# Altium PCB ArcadeMVD-STM 01-1.5.PcbDoc (part 1 of 2)
Units mm, origin at the board's own origin, x right, y up, seen from the top; angles counter-clockwise.
Board outline 51.6 x 62 mm, 2 copper layers (Top Layer, Bottom Layer), stack 1.525 mm thick; 53 components, 43 nets, 216 pads, 131 vias.
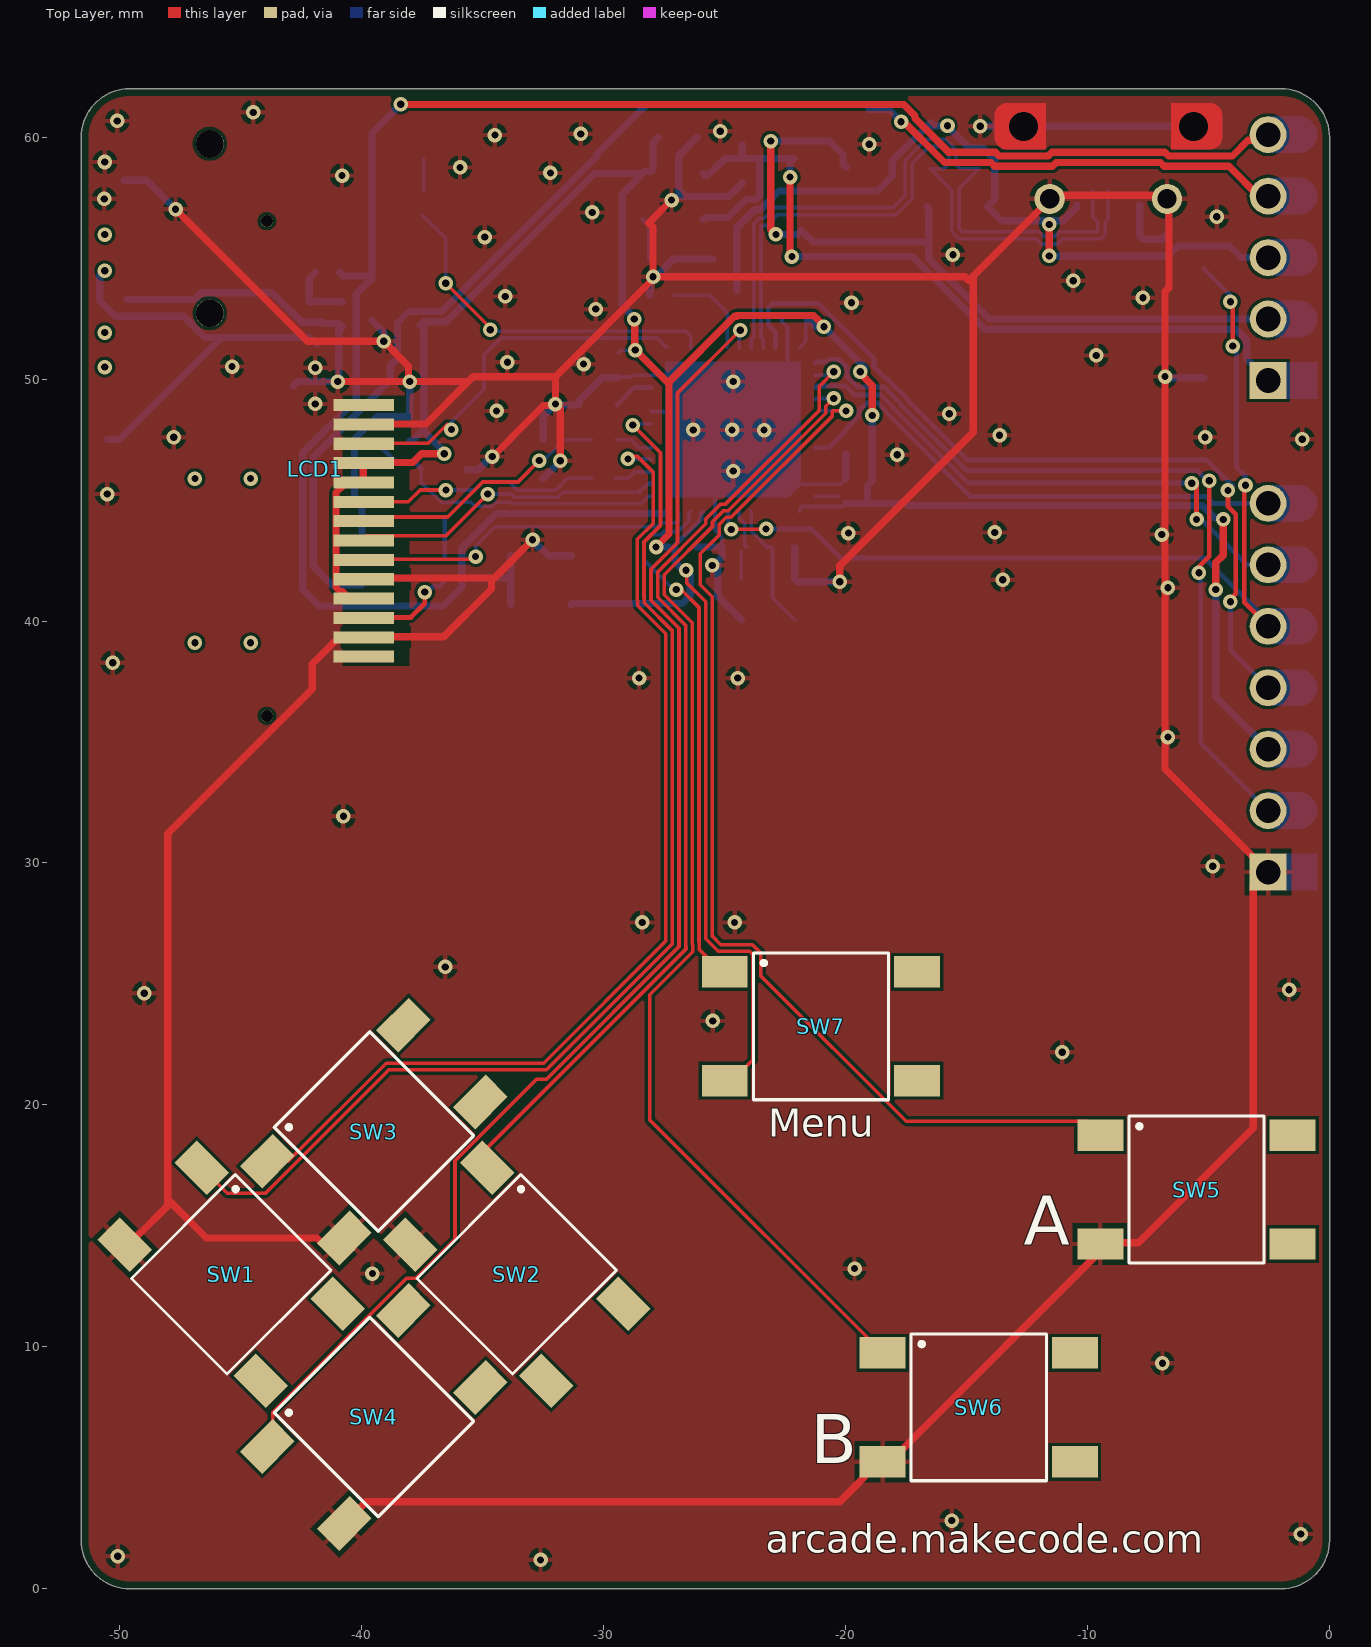
[diagram p0: Top Layer view]
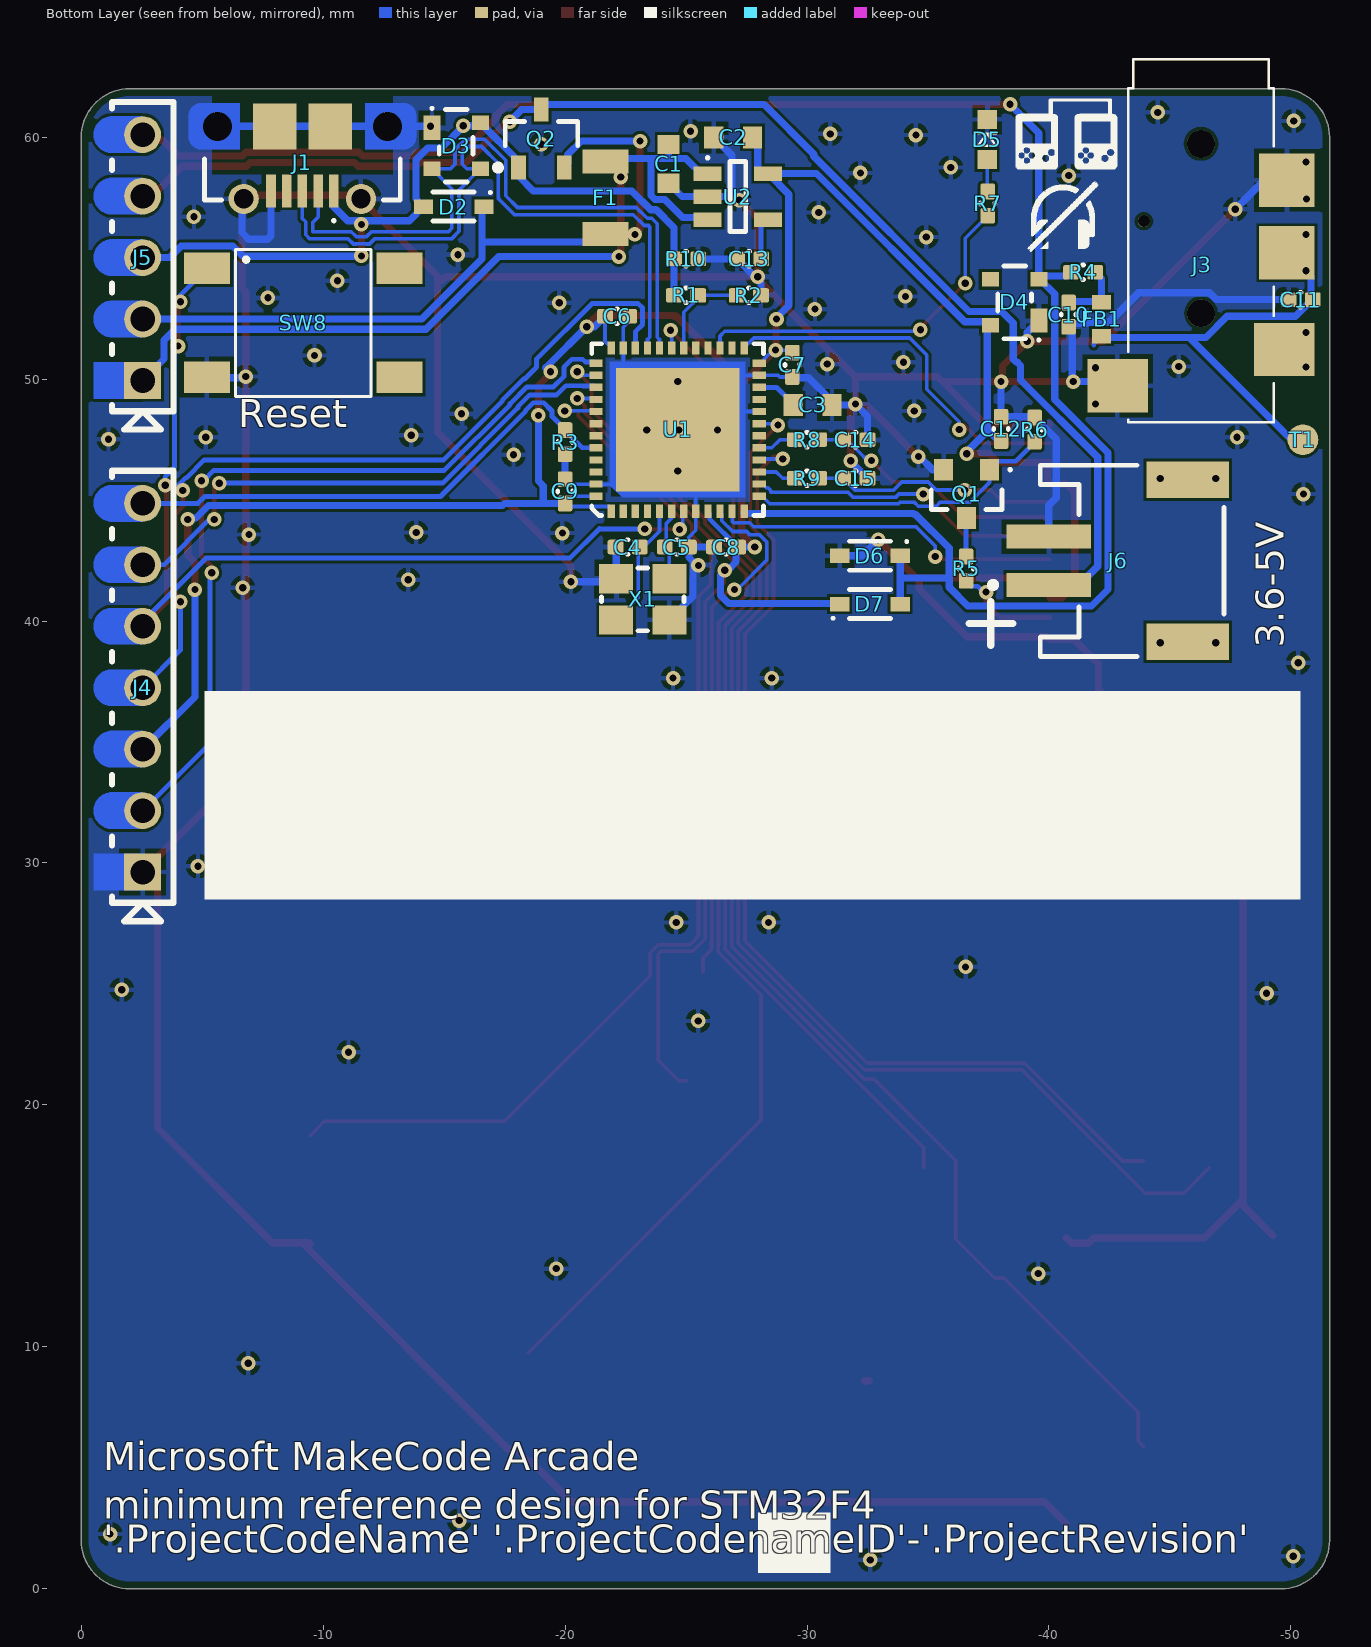
[diagram p1: Bottom Layer view, seen from below]
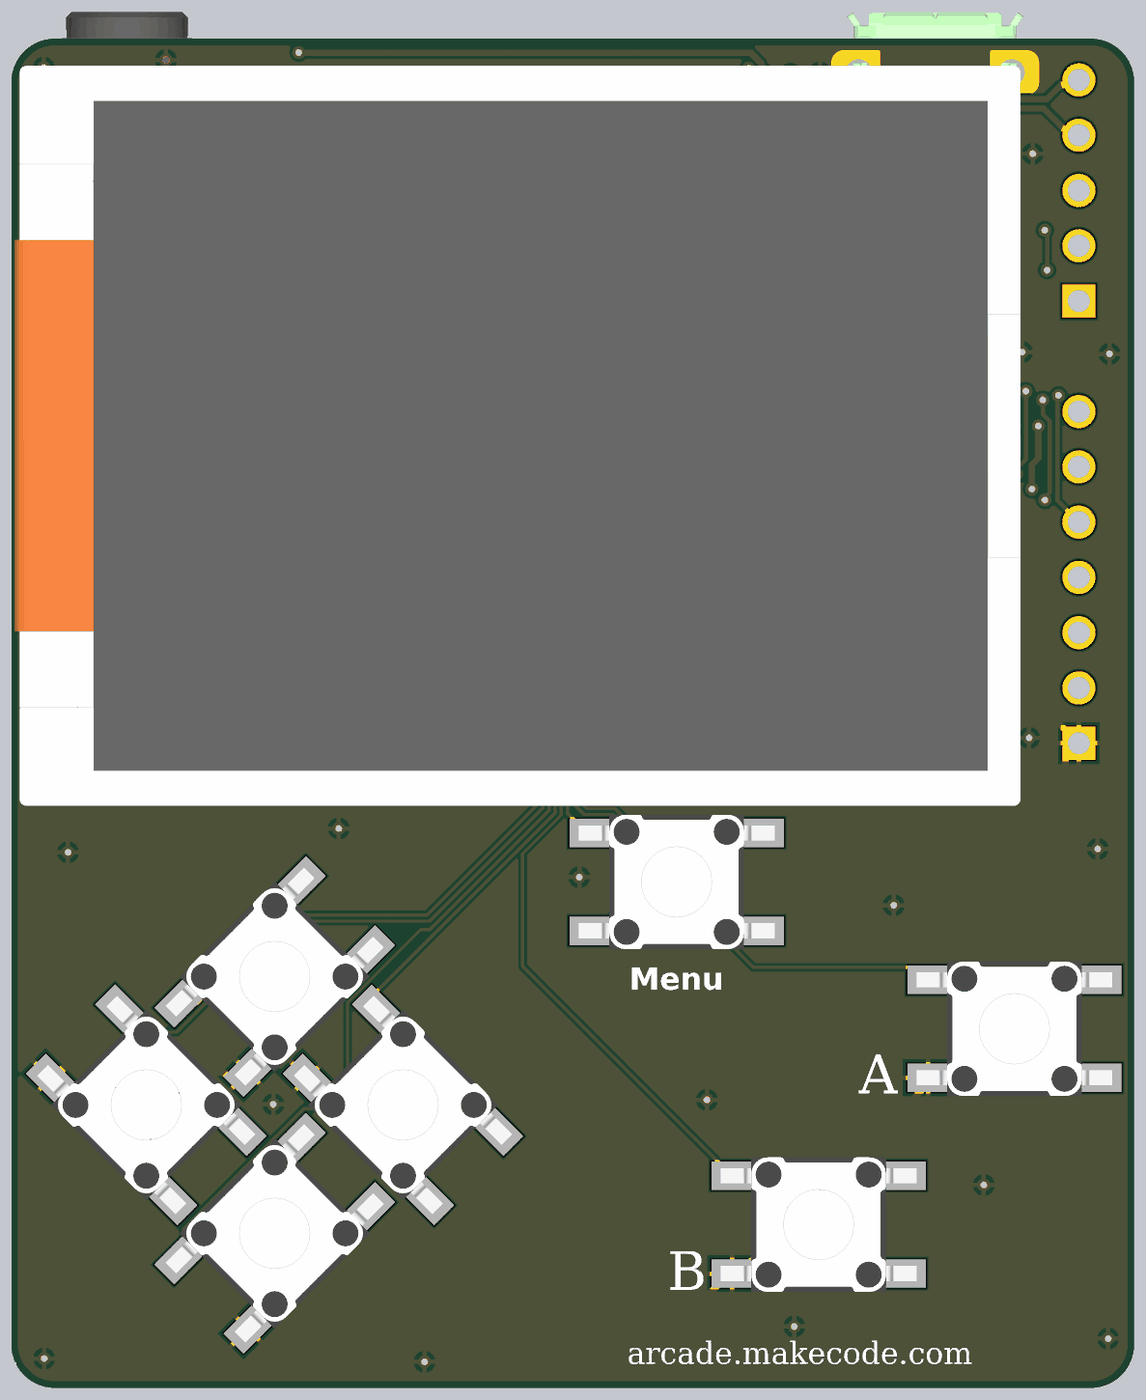
[diagram p2: 3D render of the assembled board from above, using the file's embedded part models]

## Layer stack, top to bottom
Top Solder: solder mask 0.0102, Solder Resist, Dk 3.5
Top Layer: signal copper 0.0356
Dielectric 1: core 1.454, FR-4, Dk 4.2
Bottom Layer: signal copper 0.0356
Bottom Solder: solder mask 0.0102, Solder Resist, Dk 3.5

## Board outline
-51.6,2 ccw(c-49.6,2) -49.6,0 -2,0 ccw(c-2,2) 0,2 0,60 ccw(c-2,60) -2,62 -49.6,62 ccw(c-49.6,60) -51.6,60

## Design rules (kind name [scope] priority, off if disabled: settings)
AssemblyTestPointUsage [All] p1: valid=2
BoardOutlineClearance [All] p1: gap=0.3 ignorepadtopadclearanceinfootprint=FALSE except(0: Arc-SplitContinuation Track-SplitContinuation SMDPad-SplitContinuation THPad-SplitContinuation Via-SplitContinuation Fill-SplitContinuation Poly-SplitContinuation Region-SplitContinuation Text-SplitContinuation)
Clearance [All] p1: gap=0.125 ignorepadtopadclearanceinfootprint=FALSE except(0: Arc-Hole Track-Hole SMDPad-Hole THPad-Hole Via-Hole Fill-Hole Poly-Hole Region-Hole Text-Hole)
DiffPairsRouting [All] p1: maxlimit=2 minlimit=0.15 mostfreqgap=0.15 toplayer_minwidth=0.15 toplayer_maxwidth=2 toplayer_prefwidth=0.15 bottomlayer_minwidth=0.15 bottomlayer_maxwidth=2 bottomlayer_prefwidth=0.15 maxuncoupledlength=25
FabricationTestPointUsage [All] p1: valid=2 allowmultiple=FALSE
HoleSize [All] p1: absolutevalues=TRUE maxlimit=2.54 minlimit=0.2 maxpercent=80.000 minpercent=20.000
MinimumSolderMaskSliver [All] p1: minsoldermaskwidth=0.005
PlaneClearance [All] p1: clearance=0.3
PlaneConnect [All] p1: planeconnectstyle=Relief reliefexpansion=0.5 reliefentries=4 reliefconductorwidth=0.2 reliefairgap=0.3
PolygonConnect "PolygonConnect GND" [isVIA] p1: connectstyle=Relief reliefconductorwidth=0.2 reliefentries=4 polygonreliefangle="90 Angle" airgapwidth=0.2
PolygonConnect [All] p2: connectstyle=Relief reliefconductorwidth=0.2 reliefentries=4 polygonreliefangle="90 Angle" airgapwidth=0.2
RoutingVias [All] p1: holewidth=0.3 width=0.6 viastyle="Through Hole" minholewidth=0.3 minwidth=0.6 maxholewidth=0.3 maxwidth=0.8
SilkToSilkClearance [All] p1: silktosilkclearance=0.001
SilkToSolderMaskClearance [IsPad] p1: minsilkscreentomaskgap=0.05 clearancetoexposedcopper=TRUE
SolderMaskExpansion [All] p1: expansion=0.075
Width [All] p1: maxlimit=2 minlimit=0.15 preferedwidth=0.15 minimp=50.000000 maximp=50.000000 favimp=50.000000
21 further rules are at their usual default settings.

## Classes and differential pairs
differential pair USB_D: +USB_D_P -USB_D_N

## Components (designator, comment, footprint, x,y, rotation, side; value= is the part's Value field where it differs from the comment)
C1 "CL10A475KP8NNNC" "CAP 0603 (1608) x 1.2mm" -24.276,58.9 r90 bottom
C2 "CL10A475KP8NNNC" "CAP 0603 (1608) x 1.2mm" -26.944,59.993 r180 bottom
C3 "CL10A475KP8NNNC" "CAP 0603 (1608) x 1.2mm" -30.23,48.935 r0 bottom
C4 "CAP0402_GENERIC 12pF" CAP0402 -22.586,43.061 r180 bottom value=12pF
C5 "CAP0402_GENERIC 12pF" CAP0402 -24.618,43.061 r0 bottom value=12pF
C6 "0402YG104ZAT2A" CAP0402 -22.15,52.599 r0 bottom
C7 "0402YG104ZAT2A" CAP0402 -29.396,50.59 r90 bottom
C8 "0402YG104ZAT2A" CAP0402 -26.654,43.061 r180 bottom
C9 "0402YG104ZAT2A" CAP0402 -20,45.361 r270 bottom
C10 "CAP0402_GENERIC 33pF" CAP0402 -40.81,52.668 r90 bottom value=33pF
C11 "DNF" CAP0402 -50.402,53.287 r180 bottom value=33pF
C12 "0402YG104ZAT2A" CAP0402 -38.02,47.944 r270 bottom
C13 "0402YG104ZAT2A" CAP0402 -27.605,54.97 r180 bottom
C14 "CAP0402_GENERIC 33pF" CAP0402 -32,47.5 r0 bottom value=33pF
C15 "CAP0402_GENERIC 33pF" CAP0402 -32,45.9 r0 bottom value=33pF
D2 "BAT60" INF-SOD323_V -15.396,57.131 r270 bottom
D3 "NXP-PRTR5V0U2X,215-4-whitesch" NXP-SOT143B-4_V -15.499,59.642 r180 bottom
D4 "NXP-PRTR5V0U2X,215-4-whitesch" NXP-SOT143B-4_V -38.583,53.17 r0 bottom
D5 "SML-D12D" "Rohm SML-D12 Orange" -37.446,59.904 r270 bottom
D6 "BAT60AE6327HTSA1" INF-SOD323_V -32.6,42.7 r270 bottom
D7 "BAT60AE6327HTSA1" INF-SOD323_V -32.6,40.7 r90 bottom
F1 "0.2A/0.4A" "FUSE 1206 x 0.58mm" -21.676,57.5 r270 bottom
FB1 "TDK MPZ1608S102ATA00" "TDK MPZ1608 0.8mm" -42.175,52.474 r270 bottom
J1 "ZX62D-B-5PA8(30)-whitesch" HIRO-ZX62D-B-5PA8_V-noslots -9.142,58.95 r0 bottom
J3 "SJ2-3574A-SMT" SJ2-3574A-SMT-TR-BASIC -46.285,62.023 r270 bottom
J4 "DNF" "0022284070 pads only elongated" -2.54,29.625 r90 bottom
J5 "MOLEX-0022284050-whitesch" "0022284050 pads only elongated" -2.54,49.945 r90 bottom
J6 "S2B-PH-SM4-TB(LF)(SN)" JST-S2B-PH-SM4-TB -43.44,42.492 r90 bottom
LCD1 "JD-T18003-T01" JD-T18003-T01-BASIC -4.898,60.728 r180 top
Q1 "small signal N channel MOSFET" ONSC-SOT-23-3-318-08_V -36.594,45.257 r270 bottom
Q2 "MOSFET" DIODES-SOT23-3 -19.025,59.944 r90 bottom
R1 "DNF" RES0402 -25,53.461 r180 bottom value=4k7
R2 "DNF" RES0402 -27.6,53.461 r180 bottom value=10k
R3 "RES0402_GENERIC 100k" RES0402 -20,47.393 r270 bottom value=100k
R4 "RES0402_GENERIC 220R" RES0402 -41.414,54.414 r180 bottom value=220R
R5 "RES0402_GENERIC 10R" RES0402 -36.574,42.167 r90 bottom value=10R
R6 "RES0402_GENERIC 100k" RES0402 -39.406,47.915 r90 bottom value=100k
R7 "RES0402_GENERIC 100R" RES0402 -37.475,57.258 r90 bottom value=100R
R8 "RES0402_GENERIC 10R" RES0402 -30,47.5 r180 bottom value=10R
R9 "RES0402_GENERIC 10R" RES0402 -30,45.9 r180 bottom value=10R
R10 "RES0402_GENERIC 100k" RES0402 -25,54.97 r180 bottom value=100k
SW1 "Tact Wurth 430152050826" "Wurth 430152050836-WIDE" -45.4,13 r315 top
SW2 "Tact Wurth 430152050826" "Wurth 430152050836-WIDE" -33.6,13 r315 top
SW3 "Tact Wurth 430152050826" "Wurth 430152050836-WIDE" -39.5,18.9 r45 top
SW4 "Tact Wurth 430152050826" "Wurth 430152050836-WIDE" -39.5,7.1 r45 top
SW5 "Tact Wurth 430152050826" "Wurth 430152050836-WIDE" -5.5,16.5 r0 top
SW6 "Tact Wurth 430152050826" "Wurth 430152050836-WIDE" -14.5,7.5 r0 top
SW7 "Tact Wurth 430152050826" "Wurth 430152050836-WIDE" -21.025,23.25 r0 top
SW8 "Tact Wurth 430152050826" "Wurth 430152050836-WIDE" -9.175,52.325 r180 bottom
T1 "TestPoint" Pad1.27mm -42.448,60.756 r180 bottom
U1 "ST STM32F411CEU6" "ST UFQFPN48 SEH" -24.654,47.911 r90 bottom
U2 "SPX3819M5-L-3-3_TR" MaxLinear-SOT95P280X145-5N -27.142,57.547 r180 bottom
X1 "24MHz SMD xtal 3.2x2.5mm" "generic xtal 3.2x2.5" -23.212,40.899 r180 bottom

## Footprints (in the part's own frame and the unit in brackets; to place one, negate y for a bottom-side part, rotate by r counter-clockwise, add the part's x,y. Pads: shape width x height; smd on the part's side, far side on the other; paste and mask are expansions set on the pad)
"0022284050 pads only elongated" [mil] "4-way header"
  rect 60x60 hole 40: 1(0,0)
  round 60 hole 40: 2(100,0) 3(200,0) 4(300,0) 5(400,0)
  Top Layer circle w30: c400,50 r15
  Top Layer circle w30: c300,50 r15
  Top Layer circle w30: c200,50 r15
  Top Layer circle w30: c100,50 r15
  Top Layer region: 370,50 430,50 430,0 370,0
  Top Layer region: -30,80 30,80 30,0 -30,0
  Top Layer region: 270,50 330,50 330,0 270,0
  Top Layer region: 170,50 230,50 230,0 170,0
  Top Layer region: 70,50 130,50 130,0 70,0
  silkscreen extent -80,-50 453,50
"0022284070 pads only elongated" [mil] "7-way header"
  rect 60x60 hole 40: 1(0,0)
  round 60 hole 40: 2(100,0) 3(200,0) 4(300,0) 5(400,0) 6(500,0) 7(600,0)
  Top Layer circle w30: c600,50 r15
  Top Layer circle w30: c500,50 r15
  Top Layer circle w30: c300,50 r15
  Top Layer circle w30: c200,50 r15
  Top Layer circle w30: c100,50 r15
  Top Layer circle w30: c400,50 r15
  Top Layer region: -30,80 30,80 30,0 -30,0
  Top Layer region: 570,50 630,50 630,0 570,0
  Top Layer region: 470,50 530,50 530,0 470,0
  Top Layer region: 370,50 430,50 430,0 370,0
  Top Layer region: 270,50 330,50 330,0 270,0
  Top Layer region: 170,50 230,50 230,0 170,0
  Top Layer region: 70,50 130,50 130,0 70,0
  silkscreen extent -80,-50 653,50
CAP0402 [mm] "Chip Capacitor 0402"
  rrect25% 0.65x0.6 smd: 1(-0.5,0) 2(0.5,0)
  silkscreen extent -0.03,-0.3 0.03,0.3, body extent -0.53,-0.28 0.53,0.27, height 0.5
"CAP 0603 (1608) x 1.2mm" [mm] "murata largest recogmended dimentions for 1608 +-0.2mm"
  rect 0.8x0.9 smd: 1(-0.8,0) 2(0.8,0)
  body extent -0.9,-0.5 0.9,0.5, height 1.2
DIODES-SOT23-3 [mm] "SOT23, 3-Leads, Body 2.90x2.45mm, Pitch 0.95mm, IPC Medium Density"
  rect 1x0.6 smd: 1(-1.2,0.95) 2(-1.2,-0.95) 3(1.2,0)
  silkscreen extent -1.32,-1.5 0.7,1.93, body extent -1.27,-1.5 1.23,1.5, height 1.1
"FUSE 1206 x 0.58mm" [mm] "Chip fuse 1206"
  rect 1x1.9 smd: 1(-1.5,0) 2(1.5,0)
  body extent -1.5,-0.9 1.5,0.9, height 0.55
"generic xtal 3.2x2.5" [mm] "rystal SMD 3.2mm x 2.5mm"
  rect 1.4x1.2 smd: 1(-1.1,-0.85) 2(1.1,-0.85) 3(1.1,0.85) 4(-1.1,0.85)
  silkscreen extent -1.7,-1.3 1.7,1.3, body extent -1.6,-1.25 1.6,1.25, height 0.7
HIRO-ZX62D-B-5PA8_V-noslots [mm] "SMD, 5-Leads, Body 7.5x5mm, Pitch 0.65mm"
  rect 0.4x1.35 smd: 1(-1.3,1.175) 2(-0.65,1.175) 3(0,1.175) 4(0.65,1.175) 5(1.3,1.175)
  round 1.25 hole 0.8: 6(-2.425,1.5) 7(2.425,1.5)
  oval 0.525x1.2 hole 1.2: 8(-3.512,-1.5) 11(3.512,-1.5)
  rect 1.8x1.9 smd: 9(-1.15,-1.5) 10(1.15,-1.5)
  Top Layer region: -4.2,-2.45 -4.391,-2.412 -4.554,-2.304 -4.662,-2.141 -4.7,-1.95 -4.7,-1.95 -4.7,-1.05 -4.662,-0.859 -4.554,-0.696 -4.391,-0.588 -4.2,-0.55 -4.2,-0.55 -2.6,-0.55 -2.6,-2.45
  Top Layer region: 4.2,-2.45 4.391,-2.412 4.554,-2.304 4.662,-2.141 4.7,-1.95 4.7,-1.95 4.7,-1.05 4.662,-0.859 4.554,-0.696 4.391,-0.588 4.2,-0.55 4.2,-0.55 2.6,-0.55 2.6,-2.45
  Top Layer pour cut-out: -3.75,0.5 -3.75,-2.95 3.75,-2.95 3.75,0.5
  Bottom Layer region: -4.2,-2.45 -4.391,-2.412 -4.554,-2.304 -4.662,-2.141 -4.7,-1.95 -4.7,-1.95 -4.7,-1.05 -4.662,-0.859 -4.554,-0.696 -4.391,-0.588 -4.2,-0.55 -4.2,-0.55 -2.6,-0.55 -2.6,-2.45
  Bottom Layer region: 4.2,-2.45 4.391,-2.412 4.554,-2.304 4.662,-2.141 4.7,-1.95 4.7,-1.95 4.7,-1.05 4.662,-0.859 4.554,-0.696 4.391,-0.588 4.2,-0.55 4.2,-0.55 2.6,-0.55 2.6,-2.45
  silkscreen extent -4.05,-0.15 4.05,2.45, body extent -4.05,-4.25 4.05,1.55, height 2.75
INF-SOD323_V [mm] "SOD, 2-Leads, Body 1.7x1.25 mm"
  rect 0.6x0.8 smd: 1(0,1.25) 2(0,-1.25)
  silkscreen extent -0.63,-0.85 0.6,1.57, body extent -0.65,-1.25 0.65,1.25, height 1.1
JD-T18003-T01-BASIC [mm] "128x160 colour LCD"
  rect 2.5x0.5 smd: 1(35.025,22.2) 2(35.025,21.4) 3(35.025,20.6) 4(35.025,19.8) 5(35.025,19) 6(35.025,18.2) 7(35.025,17.4) 8(35.025,16.6) 9(35.025,15.8) 10(35.025,15) 11(35.025,14.2) 12(35.025,13.4) 13(35.025,12.6) 14(35.025,11.8)
  round 0.5 hole 0.5 unplated: 1(39.025,24.65) 1(39.025,4.2)
  body extent 0.32,-0.02 46.55,33.98, height 2.6
JST-S2B-PH-SM4-TB [mm] "SMD, 2-Leads, Body 7.9x7.6mm, Pitch 2mm"
  rect 1x3.5 smd: 1(-1,3.45) 2(1,3.45)
  rect 1.5x3.4 smd: M1(-3.35,-2.3) M2(3.35,-2.3)
  silkscreen extent -3.95,-3.8 3.95,5.88, body extent -4.01,-3.83 3.99,4.93, height 5.51
MaxLinear-SOT95P280X145-5N [mm]
  rect 1.15x0.6 smd: 1(-1.25,0.95) 2(-1.25,0) 3(-1.25,-0.95) 4(1.25,-0.95) 5(1.25,0.95)
  silkscreen extent -1.3,-1.45 0.33,1.65, body extent -1.4,-1.45 1.4,1.45, height 1.45
NXP-SOT143B-4_V [mm] "SOT143, 4-Leads, Body 3x1.4mm"
  rect 0.7x1 smd: 1(-1,0.75)
  rect 0.7x0.6 smd: 2(-1,-0.95) 3(1,-0.95) 4(1,0.95)
  silkscreen extent -1.05,-1.5 0.7,1.6, body extent -1.17,-1.48 1.17,1.48, height 1.08
ONSC-SOT-23-3-318-08_V [mm] "SOT23, 3-Leads, Body 2.92x1.3mm, Pitch 0.95mm"
  rect 0.9x0.8 smd: 1(-1,0.95) 2(-1,-0.95) 3(1,0)
  silkscreen extent -1.05,-1.46 0.65,1.85, body extent -1.4,-1.47 1.4,1.47, height 1.28
Pad1.27mm [mm] "1.27mm dia round pad"
  round 1.27 smd paste-2.54: 1(8.052,-13.256)
RES0402 [mm] "Chip Resistor 0402"
  rrect25% 0.65x0.6 smd: 1(-0.5,0) 2(0.5,0)
  silkscreen extent -0.03,-0.3 0.03,0.3, body extent -0.53,-0.28 0.53,0.27, height 0.35
"Rohm SML-D12 Orange" [mm]
  rect 0.8x0.8 smd paste-0.05: 1(-0.825,0) 2(0.825,0)
  silkscreen extent -0.25,-0.38 0.25,0.38, body extent -0.8,-0.4 0.8,0.4, height 0.54
SJ2-3574A-SMT-TR-BASIC [mm] "3.5mm 4 contact SMD socket"
  rect 2.2x2.5 smd: 1(12.3,-3.45) 2(10.8,3.45)
  rect 2.2x2.3 smd: 3(6.8,3.55) 4(3.8,3.55)
  round 1.15 hole 1.15 unplated: ""(2.3,0) ""(9.3,0)
  silkscreen extent -1.2,-3 13.8,3, body extent -1.2,-4.2 13.8,4.2, height 5.3
"ST UFQFPN48 SEH" [mm]
  rect 0.55x0.3 smd mask+0.05: 1(-3.375,2.75) 2(-3.375,2.25) 3(-3.375,1.75) 4(-3.375,1.25) 5(-3.375,0.75) 6(-3.375,0.25) 7(-3.375,-0.25) 8(-3.375,-0.75) 9(-3.375,-1.25) 10(-3.375,-1.75) 11(-3.375,-2.25) 12(-3.375,-2.75) 25(3.375,-2.75) 26(3.375,-2.25) 27(3.375,-1.75) 28(3.375,-1.25) 29(3.375,-0.75) 30(3.375,-0.25) 31(3.375,0.25) 32(3.375,0.75) 33(3.375,1.25) 34(3.375,1.75) 35(3.375,2.25) 36(3.375,2.75)
  rect 0.3x0.55 smd mask+0.05: 13(-2.75,-3.375) 14(-2.25,-3.375) 15(-1.75,-3.375) 16(-1.25,-3.375) 17(-0.75,-3.375) 18(-0.25,-3.375) 19(0.25,-3.375) 20(0.75,-3.375) 21(1.25,-3.375) 22(1.75,-3.375) 23(2.25,-3.375) 24(2.75,-3.375) 37(2.75,3.375) 38(2.25,3.375) 39(1.75,3.375) 40(1.25,3.375) 41(0.75,3.375) 42(0.25,3.375) 43(-0.25,3.375) 44(-0.75,3.375) 45(-1.25,3.375) 46(-1.75,3.375) 47(-2.25,3.375) 48(-2.75,3.375)
  rect 5.1x5.1 smd paste-3 mask+0: 49(0,0)
  Top Layer region: 2.8,-2.8 -2.8,-2.8 -2.8,2.3 -2.3,2.8 2.8,2.8
  silkscreen extent -3.55,-3.55 3.55,3.55, body extent -3.5,-3.5 3.5,3.5, height 0.53
"TDK MPZ1608 0.8mm" [mm]
  rect 0.6x0.8 smd paste-0.1: 1(-0.7,0) 2(0.7,0)
  body extent -0.8,-0.4 0.8,0.4, height 0.8
"Wurth 430152050836-WIDE" [mm] "6*6mm vertical type, SMD, height 5.0mm, black actuator, 160gf, T&R"
  rect 1.9x1.3 smd: 1(-3.975,2.25) 2(-3.975,-2.25) 3(3.975,2.25) 4(3.975,-2.25)
  silkscreen extent -2.79,-3.04 2.79,3.04, body extent -4.5,-3.1 4.5,3.1, height 5

## Part data
C1 C2 C3: library part "4.7uF 10V X5R ±10% Samsung CL", "Generic 4.7uF 10V 0603 cap, e.g. Samsung CL10A475KP8NNNC", Capacitance=4.7µF, Case/Package=0603, Case Code (Metric)=1608, Dielectric=X5R, Manufacturer=Samsung, Max Operating Temperature=85°C, Min Operating Temperature=-55°C, Package Quantity=1, Supplier Part Number 1=1276-1044-1-ND, Tolerance=10%, Voltage Rating=10V, Case Code (Imperial)=0603, Contact Plating=Tin, Created By=shodges, Depth=0.8mm, Height=0.8mm, Length=1.6mm, Manufacturer Part Number=CL10A475KP8NNNC, Mount="Surface Mount", Packaging="Tape and Reel", Pricing 1="1=0.15, 10=0.109, 100=0.0513, 500=0.036, 1000=0.0298 (USD)", Radiation Hardening=No, Stock 1=40000, Supplier 1=Digi-Key, Supplier 2=Farnell, Supplier Part Number 2=3010071, Thickness=0.035inch, Width=0.031inch
C4 C5: library part CAP0402_GENERIC, "Generic 0402 Chip Capacitor 12pF", Package Size=0402, Rated Voltage="* V"
C6 C7 C8 C9 C12 C13: "Generic 100nF 16V 0402 cap e.g. Kyocera/AVX 0402YG104ZAT2A", Capacitance=100nF, Case/Package=0402, Case Code (Metric)=1005, Dielectric=Y5V, Insulation Resistance=100GR, Manufacturer="Kyocera AVX", Max Operating Temperature=85°C, Min Operating Temperature=-30°C, Package Quantity=1, Supplier Part Number 1=478-1138-1-ND, Tolerance=80%, Voltage=16V, Case Code (Imperial)=0402, ComponentLink2Description="AVX datasheet online", ComponentLink2URL=http://datasheets.avx.com/Y5V.pdf, Contact Plating=Tin,Matte, Depth=0.5mm, Dissipation Factor=9%, Height=0.5mm, Lead Free="Lead Free", Length=1mm, Manufacturer Part Number=0402YG104ZAT2A, Mount="Surface Mount,PCB", Packaging="Tape and Reel", Pricing 1="1=0.1, 10=0.041, 100=0.0183, 500=0.01306, 1000=0.01026, 2500=0.00933, 5000=0.00858 (USD)", Radiation Hardening=No, REACH SVHC="No SVHC", Stock 1=0, Supplier 1=Digi-Key, Supplier 2=Farnell, Supplier 3=Mouser, Supplier 4=RSComponents, Supplier Part Number 2=1327667, Supplier Part Number 3=581-040216G104Z, Supplier Part Number 4=698-3190, Termination=SMD/SMT, Thickness=0.022inch, Voltage Rating=16V, Voltage Rating (DC)=16V, Width=0.02inch
C10 C14 C15: library part CAP0402_GENERIC, "Generic 0402 Chip Capacitor 33pF", Package Size=0402, Rated Voltage="* V"
C11: library part CAP0402_GENERIC, "Generic 0402 Chip Capacitor", Package Size=0402, Rated Voltage="* V"
D2: library part BAT60AE6327HTSA1, "Schottky diode, 3A low Vf", Average Rectified Current=3A, Case/Package=SOD-323-2, Forward Voltage=370mV, Manufacturer=Infineon, Max Operating Temperature=85°C, Max Repetitive Reverse Voltage (Vrrm)=10V, Min Operating Temperature=-55°C, Peak Non-Repetitive Surge Current=5A, Supplier Part Number 1=BAT60AE6327HTSA1CT-ND, ComponentLink1Description="Infineon datasheet online", ComponentLink1URL=http://www.infineon.com/dgdl/bat60aseries.pdf?folderId=db3a304313d846880113def5812204a1&fileId=db3a304313d846880113def70c9304a9&src-supplier=Avnet, ComponentLink3Description="Infineon datasheet", ComponentLink3URL="y:\System\Altium\Libraries 2014\Infineon\Datasheets\Infineon-BAT60ASERIES-DS-v01_01-en.pdf", Contact Plating=Tin, Current Rating=3A, Element Configuration=Single, Forward Current=3A, Halogen Free="Not Halogen Free", Lead Free="Lead Free", Manufacturer Part Number=BAT60AE6327HTSA1, Max Reverse Voltage (DC)=10V, Mount="Surface Mount", Number of Pins=2, Output Current=3A, Packaging="Tape and Reel", Polarity=Standard, Pricing 1="1=0.47, 10=0.354, 100=0.2204, 500=0.15078, 1000=0.11598 (USD)", Radiation Hardening=No, REACH SVHC="No SVHC", Stock 1=55772, Supplier 1=Digi-Key, Supplier 2=Farnell, Supplier 3=Mouser, Supplier 4=RSComponents, Supplier Part Number 2=2432679, Supplier Part Number 3=726-BAT60AE6327HTSA1, Supplier Part Number 4=7527855, Voltage Rating (DC)=10V
D3 D4: "USB TVS and ESD protection diodes", Breakdown Voltage=6V, Capacitance=16pF, Case/Package=SOT, Leakage Current=100nA, Manufacturer="NXP Semiconductors", Manufacturer Part Number=PRTR5V0U2X,215, Max Breakdown Voltage=9V, Max Operating Temperature=85°C, Max Reverse Leakage Current=100uA, Min Operating Temperature=-40°C, Package Quantity=1, Power Line Protection=Yes, Reverse Standoff Voltage=5.5V, Supplier Part Number 1=1727-3884-1-ND, ComponentLink8Description="NXP datasheet", ComponentLink8URL=http://www.farnell.com/datasheets/109718.pdf?src-supplier=Farnell, Contact Plating=Tin, Depth=1.4mm, Direction=Unidirectional, ESD Protection=Yes, Height=1.1mm, Lead Free="Lead Free", Length=3mm, Min Breakdown Voltage=6V, Mount="Surface Mount", Number of Bidirectional Channels=2, Number of Channels=2, Number of Elements=1, Number of Pins=4, Packaging="Tape and Reel", Polarity=Bidirectional,Unidirectional, Pricing 1="1=0.55, 10=0.47, 100=0.3507, 500=0.27552, 1000=0.2129 (USD)", Radiation Hardening=No, REACH SVHC="No SVHC", Reverse Breakdown Voltage=6V, Stock 1=109808, Supplier 1=Digi-Key, Supplier 2=Farnell, Supplier 3=RSComponents, Supplier 4=Mouser, Supplier Part Number 2=2371119, Supplier Part Number 3=725-8720, Supplier Part Number 4=771-PRTR5V0U2X-T/R, Termination=SMD/SMT, Weight=0.001lb, Width=1.4mm, Working Voltage=5.5V
D5: "Generic 0603 Orange LED, e.g. Rohm SML-D12D8WT86", Colour=Orange, Current - Test=20mA, Luminous Flux @ Current - Test=-, Manufacturer="Rohm Semiconductor", Manufacturer Part Number=SML-D12D8WT86, Millicandela Rating=100mcd, Package / Case="0603 (1608 Metric)", Supplier Part Number 1=511-1577-1-ND, Voltage - Forward (Vf) (Typ)=2.2V, Category=Optoelectronics, ComponentLink1Description=http://rohmfs.rohm.com/en/products/databook/datasheet/opto/led/chip_mono/sml-d1.pdf, ComponentLink1URL=http://rohmfs.rohm.com/en/products/databook/datasheet/opto/led/chip_mono/sml-d1.pdf, Height=0.55mm, Lens Style/Size="Rectangle with Flat Top, 1.2mm x 0.8mm", Lens Type="Diffused, White", Mounting Type="Surface Mount", Packaging="Cut Tape (CT)", Pricing 1="1=0.38, 10=0.279, 25=0.2232, 100=0.1478, 250=0.1046, 500=0.08926, 1000=0.06974 (GBP)", RoHS="RoHS Compliant", Size / Dimension="1.60mm L x 0.80mm W", Stock 1=1719, Supplier 1=Digi-Key, Viewing Angle=-, Wavelength - Dominant=605nm, Wavelength - Peak=-
D6 D7: "Schottky diode, 3A low Vf", Average Rectified Current=3A, Case/Package=SOD-323-2, Forward Voltage=370mV, Manufacturer=Infineon, Max Operating Temperature=85°C, Max Repetitive Reverse Voltage (Vrrm)=10V, Min Operating Temperature=-55°C, Peak Non-Repetitive Surge Current=5A, Supplier Part Number 1=BAT60AE6327HTSA1CT-ND, ComponentLink1Description="Infineon datasheet online", ComponentLink1URL=http://www.infineon.com/dgdl/bat60aseries.pdf?folderId=db3a304313d846880113def5812204a1&fileId=db3a304313d846880113def70c9304a9&src-supplier=Avnet, ComponentLink3Description="Infineon datasheet", ComponentLink3URL="y:\System\Altium\Libraries 2014\Infineon\Datasheets\Infineon-BAT60ASERIES-DS-v01_01-en.pdf", Contact Plating=Tin, Current Rating=3A, Element Configuration=Single, Forward Current=3A, Halogen Free="Not Halogen Free", Lead Free="Lead Free", Manufacturer Part Number=BAT60AE6327HTSA1, Max Reverse Voltage (DC)=10V, Mount="Surface Mount", Number of Pins=2, Output Current=3A, Packaging="Tape and Reel", Polarity=Standard, Pricing 1="1=0.47, 10=0.354, 100=0.2204, 500=0.15078, 1000=0.11598 (USD)", Radiation Hardening=No, REACH SVHC="No SVHC", Stock 1=55772, Supplier 1=Digi-Key, Supplier 2=Farnell, Supplier 3=Mouser, Supplier 4=RSComponents, Supplier Part Number 2=2432679, Supplier Part Number 3=726-BAT60AE6327HTSA1, Supplier Part Number 4=7527855, Voltage Rating (DC)=10V
F1: library part "PTC Bel Fuse 0ZCJ0020FF2E", "Generic 1206 resetable fuse 0.2A hold 0.4A trip e.g. Bel Fuse 0ZCJ0020FF2E", Case/Package=1206, Case Code (Metric)=3216, Hold Current=200mA, Manufacturer=Bel, Manufacturer Part Number=0ZCJ0020FF2E, Max Current Rating=10A, Max Operating Temperature=85°C, Max Voltage Rating (DC)=30V, Min Operating Temperature=-40°C, Package Quantity=3000, Power Dissipation=400mW, Supplier Part Number 1=507-1797-1-ND, Trip Current=400mA, Approvals=UL,TUV, Case Code (Imperial)=1206, ComponentLink1Description="Bel fuse datasheet", ComponentLink1URL="y:\System\Altium\Libraries 2014\Bel\Datasheets\0ZCJ+Nov2016", ComponentLink2Description="Bel fuse datasheet online", ComponentLink2URL=https://www.belfuse.com/resources/CircuitProtection/datasheets/0ZCJ%20Nov2016.pdf, Contact Plating=Tin,Matte, Lead Free="Lead Free", Mount="Surface Mount", Number of Terminals=2, Packaging="Cut Tape", Pricing 1="1=0.13, 5=0.13, 10=0.125, 50=0.1114, 100=0.1037, 250=0.09216, 500=0.0768, 1000=0.07296 (USD)", Stock 1=286959, Supplier 1=Digi-Key, Supplier 2=Farnell, Supplier 3=Mouser, Supplier Part Number 2=2848524, Supplier Part Number 3=530-0ZCJ0020FF2E, Time to Trip=0.1s
FB1: "0603 1k@100MHz 0.8A chip", Case/Package=0603, Case Code (Metric)=1608, Current Rating=800mA, DC Resistance (DCR)=300mR, Manufacturer=TDK, Manufacturer Part Number=MPZ1608S102ATA00, Package Quantity=4000, Supplier Part Number 1=445-8694-1-ND, Tolerance=25%, Case Code (Imperial)=0603, ComponentLink2Description="datasheet online", ComponentLink2URL=https://www.mouser.co.uk/datasheet/2/400/eads_commercial_power_mpz1608_en-923650.pdf, ComponentLink3Description=datasheet, ComponentLink3URL="Y:\System\Altium\Libraries 2014\TDK\Datasheets\eads_commercial_power_mpz1608_en-923650.pdf", Core Material=Ferrite, Height=0.037inch, Impedance="1kR @ 100MHz", Length=0.063inch, Max DC Current=800mA, Mount="Surface Mount", Packaging="Tape and Reel", Pricing 1="1=0.1, 10=0.079, 25=0.0716, 50=0.0644, 100=0.0472, 250=0.03432, 500=0.03146, 1000=0.02717 (USD)", Stock 1=113542, Supplier 1=Digi-Key, Supplier 2=Mouser, Supplier Part Number 2=810-MPZ1608S102ATA00, Width=0.031inch
J1: "Micro USB SMD with TH mechanical mount", Manufacturer=Hirose, Manufacturer Part Number=ZX62D-B-5PA8(30), Supplier Part Number 1=H125718CT-ND, ComponentLink1Description=datasheet, ComponentLink1URL="Y:\System\Altium\Libraries 2014\Hirose\Datasheets\Hirose-ZX.pdf", Connector Type=USB, Contact Material="Copper Alloy", Contact Plating=Gold, Gender=Receptacle, Lead Free="Lead Free", Mount="Surface Mount,Horizontal", Number of Contacts=5, Number of Pins=5, Orientation="Right Angle", Packaging="Tape and Reel", Pricing 1="1=0.77, 10=0.726, 25=0.6536, 50=0.5808, 100=0.5566, 250=0.5082, 500=0.484, 1000=0.3993 (USD)", REACH SVHC=Unknown, Stock 1=12999, Supplier 1=Digi-Key, Supplier 2=Farnell, Supplier 3=Mouser, Supplier 4=RSComponents, Supplier Part Number 2=2554981, Supplier Part Number 3=798-ZX62D-B-5PA830, Supplier Part Number 4=1360893, USB Standard="USB 2.0"
J3: "Generic 3/4-way 3.5mm jack socket SMD R/A, e.g. CUI SJ2-3574A-SMT", Color=Black, Manufacturer=CUI, Manufacturer Part Number=SJ2-3574A-SMT-TR, Supplier Part Number 1=CP-SJ2-3574A-SMT-CT-ND, ComponentLink1Description="CUI datasheet", ComponentLink1URL=https://www.cui.com/product/resource/sj2-357x-smt.pdf, Connector Type=Jack, Number of Conductors=4, Number of Ports=1, Orientation=Horizontal, Pricing 1="1=1.15, 10=1.013, 25=0.9532, 50=0.9134, 100=0.8736, 250=0.7942, 500=0.71478 (USD)", Shielding=Unshielded, Stock 1=2113, Supplier 1=Digi-Key, Supplier 2=Mouser, Supplier Part Number 2=490-SJ2-3574A-SMT-TR
J4: library part MOLEX-0022284070-whitesch, "CONN HEADER 7POS .100 VERT TIN", Color=Black, Contact Resistance=20mR, Manufacturer=Molex, Manufacturer Part Number=0022284070, Max Operating Temperature=75°C, Max Voltage Rating (AC)=250V, Min Operating Temperature=0°C, Package Quantity=1, Supplier Part Number 1=WM50014-07-ND, ComponentLink1Description="technical drawing", ComponentLink1URL=http://www.molex.com/pdm_docs/sd/022284060_sd.pdf, Connector Type="Male Pin", Contact Material=Bronze, Contact Mating Length=0.24inch, Contact Plating=Tin, Depth=2.49mm, Gender=Male, Housing Color=Black, Housing Material=Nylon, Length=17.78mm, Mount="Through Hole", Number of Contacts=7, Number of Positions=7, Number of Rows=1, Orientation=Straight, Packaging=Bulk, Pitch=2.54mm, Stock 1=0, Supplier 1=Digi-Key, Termination=Solder
J5: "CONN HEADER 5POS .100 VERT TIN", Color=Black, Manufacturer="Molex, LLC", Manufacturer Part Number=0022284050, Supplier Part Number 1=WM50014-05-ND, Category="Connectors, Interconnects", ComponentLink1Description="molex drawing online", ComponentLink1URL=http://www.molex.com/pdm_docs/sd/022284050_sd.pdf, Connector Type="Header, Unshrouded, Breakaway", Contact Finish=Tin, Contact Finish Thickness="100µin (2.54µm)", Contact Mating Length="0.240\" (6.10mm)", Contact Type="Male Pin", Fastening Type=-, Features=-, Mounting Type="Through Hole", Number of Positions=5, Number of Positions Loaded=All, Number of Rows=1, Packaging=Bulk, Pitch="0.100\" (2.54mm)", RoHS="RoHS Compliant", Row Spacing=-, Supplier 1=Digi-Key, Supplier 2=Farnell, Supplier Part Number 2=2381173, Termination=Solder
J6: "Generic male header, pitch 2 mm, 1x2 position, e.g. JST S2B-PH-SM4-TB(LF)(SN)", Color=Natural,White, Contact Resistance=20mR, Current Rating=2A, Flammability Rating="UL94 V-0", Housing Color=Beige, Insulation Resistance=1GR, Manufacturer=JST, Max Operating Temperature=85°C, Max Voltage Rating (AC)=100V, Min Operating Temperature=-25°C, Supplier Part Number 1=455-1749-1-ND, ComponentLink1Description="JST connector selector website", ComponentLink1URL=http://www.jst.com/home2.html, ComponentLink2Description="JST datasheet", ComponentLink2URL=http://www.jst-mfg.com/product/pdf/eng/ePH.pdf, Connector Type="Male Pin", Contact Material="Copper Alloy,Bronze,Tin,Brass", Contact Mating Length=0.13inch, Contact Plating=Tin,Copper, Depth=7.6mm, Fastening Type=Detent, Gender=Male, Height=9.4mm, Housing Material=Polyamide, Lead Free="Lead Free", Lead Pitch=2mm, Length=7.9mm, Manufacturer Part Number=S2B-PH-SM4-TB(LF)(SN), Max Current Rating=2A, Max Voltage Rating (DC)=100V, Mount="Surface Mount", Number of Contacts=2, Number of Poles=2, Number of Positions=2, Number of Rows=1, Orientation="Right Angle", Packaging="Tape and Reel", Pitch=2mm, Pricing 1="1=0.58, 10=0.547, 100=0.4194, 500=0.3647 (USD)", REACH SVHC="No SVHC", Stock 1=179134, Supplier 1=Digi-Key, Supplier 2=Farnell, Supplier 3=RSComponents, Supplier Part Number 2=9492615, Supplier Part Number 3=688-1353, Termination=Solder, Voltage Rating=100V, Voltage Rating (AC)=100V, Width=5mm, Working Voltage=100V
LCD1: "Generic 128x160 backlit colour LCD, e.g. Truly Semi JD-T18003-T01", Manufacturer="Truly Semiconductor", Supplier Part Number 1=1528-2562-ND, ComponentLink1Description="Truly Semiconductor datasheet", ComponentLink1URL=https://cdn-shop.adafruit.com/datasheets/JD-T1800.pdf, ComponentLink2Description="Adafruit product page", ComponentLink2URL=https://www.adafruit.com/product/618, Manufacturer Part Number=JD-T18003-T01, Pricing 1="1=9.95 (USD)", Stock 1=65, Supplier 1=Digi-Key, Supplier 2=Mouser, Supplier 3=Adafruit, Supplier Part Number 2=485-618, Supplier Part Number 3=618
Q1: library part 2N7002K, "Generic N-channel small signal MOSFET, e.g. On Semi 2N7002K", Case/Package=SOT-23-3, Continuous Drain Current (ID)=320mA, Drain to Source Breakdown Voltage=60V, Drain to Source Resistance=1.6R, Gate to Source Voltage (Vgs)=20V, Input Capacitance=24.5pF, Manufacturer="ON Semiconductor", Manufacturer Part Number=2N7002KT1G, Max Operating Temperature=150°C, Max Power Dissipation=420mW, Min Operating Temperature=-55°C, Package Quantity=1, Power Dissipation=300mW, Supplier Part Number 1=2N7002KT1GOSCT-ND, Threshold Voltage=2.3V, ComponentLink1Description="On Semi datasheet", ComponentLink1URL=https://www.onsemi.com/pub/Collateral/2N7002K-D.pdf, Contact Plating=Matte,Tin, Element Configuration=Single, Fall Time=9ns, Halogen Free="Halogen Free", Height=1.01mm, Lead Free="Lead Free", Length=3.04mm, Nominal Vgs=2.3V, Number of Elements=1, Number of Pins=3, On-State Resistance=1.6R, Packaging="Tape and Reel", Pricing 1="1=0.21, 10=0.193, 100=0.1264, 500=0.0618, 1000=0.04214 (USD)", Radiation Hardening=No, Rds On Max=1.6R, REACH SVHC="No SVHC", Rise Time=9ns, Stock 1=2170, Supplier 1=Digi-Key, Supplier 2=Farnell, Supplier 3=Mouser, Supplier 4=RSComponents, Supplier Part Number 2=1764535, Supplier Part Number 3=863-2N7002KT1G, Supplier Part Number 4=780-0478, Turn-Off Delay Time=55.8ns, Turn-On Delay Time=12.2ns, Width=1.4mm
Q2: library part DMG2305UX-whitesch, "MOSFET P-CH 20V 4.2A SOT23", Case/Package=TO-236-3, Continuous Drain Current (ID)=4.2A, Drain to Source Breakdown Voltage=-20V, Drain to Source Resistance=52mR, Drain to Source Voltage (Vdss)=20V, Gate to Source Voltage (Vgs)=8V, Input Capacitance=808pF, Manufacturer=Diodes, Manufacturer Part Number=DMG2305UX-13, Max Operating Temperature=150°C, Max Power Dissipation=1.4W, Min Operating Temperature=-55°C, On-State Resistance=65MR, Package Quantity=1, Supplier Part Number 1=DMG2305UX-13DICT-ND, Threshold Voltage=-900mV, ComponentLink2Description="online datasheet", ComponentLink2URL=https://datasheet.ciiva.com/18566/dmg2305ux-18566951.pdf, ComponentLink3Description=datasheet, ComponentLink3URL="Y:\System\Altium\Libraries 2014\Diodes Inc\Datasheets\dmg2305ux-30023840.pdf", Element Configuration=Single, Fall Time=34.7ns, Height=1.1mm, Lead Free="Lead Free", Length=3mm, Mount="Surface Mount", Number of Channels=1, Number of Pins=3, Packaging="Tape and Reel", Pricing 1="1=0.44, 10=0.398, 100=0.2228, 500=0.1194, 1000=0.0812 (USD)", Radiation Hardening=No, Rds On Max=52mR, REACH SVHC="No SVHC", Rise Time=13.7ns, Stock 1=131638, Supplier 1=Digi-Key, Supplier 2=Farnell, Supplier 3=Mouser, Supplier 4=RSComponents, Supplier Part Number 2=2543533, Supplier Part Number 3=621-DMG2305UX-7, Supplier Part Number 4=8270452, Turn-Off Delay Time=79.3ns, Turn-On Delay Time=10.8ns, Weight=0.000282oz, Width=1.4mm
R1: library part RES0402_GENERIC, "Generic 0402 Chip Resistor 4k7", Case=0402
R2: library part RES0402_GENERIC, "Generic 0402 Chip Resistor 10k", Case=0402
R3 R6 R10: library part RES0402_GENERIC, "Generic 0402 Chip Resistor 100k", Case=0402
R4: library part RES0402_GENERIC, "Generic 0402 Chip Resistor 220R", Case=0402
R5 R8 R9: library part RES0402_GENERIC, "Generic 0402 Chip Resistor 10R", Case=0402
R7: library part RES0402_GENERIC, "Generic 0402 Chip Resistor 100R", Case=0402
SW1 SW2 SW3 SW4 SW5 SW6 SW7 SW8: "Generic 6x6mm SPST button e,g, Wurth 430152050826", Contact Current Rating=50mA, Manufacturer="Wurth Electronics", Manufacturer Part Number=430152050826, Max Operating Temperature=85°C, Min Operating Temperature=-40°C, Operating Force=260gf, Supplier Part Number 1=732-6993-1-ND, Actuator Length=1.6mm, Actuator Material="Polymer,Liquid Crystal Polymer", Actuator Type=Standard, ComponentLink1Description="wurth datasheet online", ComponentLink1URL=http://www.farnell.com/datasheets/1910150.pdf?src-supplier=Element14, ComponentLink2Description="wurth datasheet", ComponentLink2URL="Y:\System\Altium\Libraries 2014\Wurth\Datasheets\4301x2xxx8x6 1910150.pdf", Contact Material="Stainless Steel,Steel", Current Rating=50mA, Height=5mm, Illumination Type=Non-Illuminated,Illuminated, Length=6.2mm, Mechanical Life=200000Cycles, Mount="Surface Mount", Packaging="Tape and Reel", Pricing 1="1=0.47, 500=0.38232 (USD)", REACH SVHC="No SVHC", Stock 1=2282, Supplier 1=Digi-Key, Supplier 2=Farnell, Supplier 3=RSComponents, Supplier Part Number 2=2065110, Supplier Part Number 3=7856213, Switch Function=Off-Mom, Switch Travel=0.25mm, Termination="Gull Wing", Throw Configuration=SPST, Width=6.2mm
T1: "Test Point"
U1: "ARM Cortex M4 MCU+FPU 512k Flash, 128k RAM, 100MHz, QFPN48", Case/Package=UFQFPN, Frequency=100MHz, Manufacturer=STMicroelectronics, Manufacturer Part Number=STM32F411CEU6, Max Operating Temperature=85°C, Max Power Dissipation=625mW, Max Supply Voltage=3.6V, Min Operating Temperature=-40°C, Min Supply Voltage=1.7V, Operating Supply Voltage=3.3V, Package Quantity=1560, Supplier Part Number 1=497-14907-ND, ComponentLink1Description="ST datasheet", ComponentLink1URL=https://www.st.com/resource/en/datasheet/stm32f411vc.pdf, Core Architecture=ARM, Data Bus Width=32b, Interface=I2C,I2S,IrDA,LIN,MMC,SD,SDIO,SPI,UART,USART,USB, Lead Free="Lead Free", Length=7mm, Max Frequency=100MHz, Memory Size=512KB, Memory Type=FLASH, Mount="Surface Mount", Number of ADC Channels=16, Number of I/Os=36, Number of Pins=48, Number of Programmable I/O=36, Number of Timers/Counters=8, Oscillator Type=Internal, Packaging=Tray, Peripherals="Brown-out Detect/Reset,DMA,POR,PWM,WDT", Pricing 1="1=6.25, 10=5.65, 260=4.46708, 520=4.07294, 1040=3.54739 (USD)", Radiation Hardening=No, RAM Size=128KB, REACH SVHC="No SVHC", Stock 1=16657, Supplier 1=Digi-Key, Supplier 2=Farnell, Supplier 3=Mouser, Supplier 4=RSComponents, Supplier Part Number 2=2456965, Supplier Part Number 3=511-STM32F411CEU6, Supplier Part Number 4=1106616, Watchdog Timer=Yes, Width=7mm
U2: "3.3V LDO", Case/Package=SOT-23-5, Dropout Voltage=340mV, Manufacturer=Exar, Manufacturer Part Number=SPX3819M5-L-3-3/TR, Max Input Voltage=16V, Max Operating Temperature=125°C, Max Output Current=500mA, Min Input Voltage=2.5V, Min Operating Temperature=-40°C, Min Output Voltage=3.3V, Output Voltage Accuracy=1%, Quiescent Current=3uA, Supplier Part Number 1=1016-1873-1-ND, Accuracy=1%, ComponentLink3Description="MaxLinear datasheet online", ComponentLink3URL=https://www.maxlinear.com/ds/spx3819.pdf, ComponentLink4Description="Maxlinear datasheet", ComponentLink4URL="Y:\System\Altium\Libraries 2014\MaxLinear (was Exar)\datasheets\SPX3819.pdf", Height=1.3mm, Lead Free="Lead Free", Length=2.9mm, Mount="Surface Mount", Number of Outputs=1, Number of Pins=5, Number of Regulators=1, Output Current=500mA, Output Type=Fixed, Output Voltage=3.3V, Packaging="Tape and Reel", Polarity=Positive, Pricing 1="1=0.57, 10=0.479, 25=0.4196, 100=0.3595, 250=0.3116, 500=0.26364, 1000=0.20373 (USD)", Radiation Hardening=No, Stock 1=72378, Supplier 1=Digi-Key, Supplier 2=Farnell, Supplier 3=Mouser, Supplier 4=RSComponents, Supplier Part Number 2=2889625, Supplier Part Number 3=701-SPX3819M5-L-33TR, Supplier Part Number 4=8472888, Width=1.6mm
X1: "Generic 3.2x2.5mm 24MHz 12pF SMD xtal, e.g. Multicomp MCSJK-7U-24.00-12-10-60-B-10", Frequency=24MHz, Loading capacitance=12pF, Manufacturer=Multicomp, Manufacturer Part Number=MCSJK-7U-24.00-12-10-60-B-10, Supplier Part Number 1=2853960, Tolerance=±10ppm, ComponentLink1Description="online datasheet", ComponentLink1URL=http://www.farnell.com/datasheets/2645227.pdf?_ga=2.202843601.1706070776.1558802095-240913015.1522930266, ComponentLink2Description=datasheet, ComponentLink2URL="Y:\System\Altium\Libraries 2014\Multicomp\datasheets\MCSJK-7U 3.2x2.5mm SMD xtals.pdf", ESR=60R, Pricing 1="5=0.14, 50=0.114, 250=0.105, 500=0.099, 1500=0.095, 3000=0.086, 15000=0.0843 (GBP)", Stock 1=2335, Supplier 1=Farnell

## Via types
v1: diameter 0.6, hole 0.3, Top Layer to Bottom Layer, tented both sides, 131 vias

## Nets (pads, with @x,y where several pads share a name; then routed paths per layer and width w, separated by ;. In a path a pad name is that pad's centre, name@x,y a point inside that pad or via, vN(x,y) a via of type N, cw(c..) or ccw(c..) an arc to the next point about the centre after c; other vN are vias at no path point)
3V3: C2.2 C6.2 C7.2 C8.2 C9.2 C12.2 D4.4 D7.1 J4.3 LCD1.4 LCD1.10 LCD1.11 SW7.2 U1.1 U1.9 U1.24 U1.36 U1.48 U2.5 | length 130.5
  Top Layer w0.15: v1(-26.6,42.1) -26.568,42.068 -26.568,41.575 -25.789,40.796 -25.789,26.865 -25.274,26.35 -23.967,26.35 -23.85,26.233 -23.85,24.767 -23.85,21.85 -24.7,21 SW7.2
  Top Layer w0.3: LCD1.4@-40.04,40.95 -40.54,40.95 -40.815,41.225 -40.904,41.225 -41.065,41.386 -41.065,45.314 -40.729,45.65 -40.14,45.65 -39.94,45.85 -39.94,46.511 LCD1.11 LCD1.11@-39.901,46.55 ; LCD1.11@-40.04,46.55 LCD1.11@-39.901,46.55 ; v1(-36.6,46.919) -37.532,46.919 -37.9,46.55 LCD1.11@-39.901,46.55 ; v1(-28.739,52.485) -28.719,52.466 -28.719,51.219 v1(-28.7,51.2) -27.3,49.8 ; v1(-27.84,43.061) -27.304,43.597 -27.304,49.796 -27.3,49.8 ; v1(-20.9,52.168) -20.9,52.2 -20.997,52.297 -21.19,52.49 -21.287,52.587 -21.335,52.635 -24.5,52.635 -24.5,52.6 -24.506,52.594 -24.597,52.594 -27.3,49.891 -27.3,49.8 ; v1(-19.4,50.3) -19.4,50.239 -18.9,49.739 v1(-18.9,48.5) ; v1(-4.7,41.3) -4.7,42.419 -4.4,42.719 v1(-4.4,44.2)
  Bottom Layer w0.15: C7.2 -29.286,51.2 v1@-28.81,51.2 ; v1@-28.483,51.09 -28.229,50.836 -28.229,50.736 -28.154,50.661 U1.24@-28.054,50.661 ; U1.1@-21.904,44.511 -21.904,44.661 -21.829,44.736 -20.125,44.736 C9.2 ; U1.36@-21.904,51.311 -21.65,51.565 C6.2 ; U1.48@-21.254,45.161 -20.3,45.161
  Bottom Layer w0.2: C8.2@-27.329,43.061 C8.2@-27.293,43.097 ; C8.2@-27.086,43.104 -25.979,44.211 -25.979,44.436 U1.9@-25.904,44.511 ; v1@-26.722,42.1 v1(-26.6,42.1)
  Bottom Layer w0.3: C12.2 -37.928,47.444 -37.526,47.845 ; D4.4 D4.4@-37.445,52.082 ; v1(-36.6,46.919) -36.6,47 -37.445,47.845 D4.4@-37.445,52.082 ; D7.1 -31.325,40.725 -26.762,40.725 -26.425,41.062 -26.425,41.925 v1(-26.6,42.1) ; v1(-28.739,52.485) -28.739,52.54 -29.242,53.043 -29.242,57.647 U2.5 -30.39,58.497 -36.517,52.37 -37.433,52.37 -37.445,52.358 D4.4@-37.445,52.082 ; U2.5@-28.3,58.589 -28.025,58.589 -27.967,58.647 -27.967,59.77 C2.2 ; v1(-27.84,43.061) C8.2@-27.329,43.061 ; C8.2@-27.061,42.993 -27.061,42.439 v1@-26.722,42.1 ; C6.2 -21.219,52.168 v1(-20.9,52.168) v1@-19.312,50.581 ; C9.2 -19.1,44.861 ; v1(-19.4,50.3) -19.368,50.3 -19.2,50.468 v1@-19.312,50.58 ; v1(-18.9,48.5) -18.9,45.786 -19.1,45.586 -19.1,44.861 ; v1(-4.7,41.3) -4.7,36.865 J4.3 ; v1(-4.4,44.2) -4.457,44.257 -4.744,44.257 -5.262,44.775 -17.412,44.775 -17.498,44.861 -19.1,44.861
AUDIO_OUT: U1.29
BOOT0: J4.7 R3.1 U1.44 | length 21.4
  Bottom Layer w0.2: U1.44@-21.254,47.161 -21.251,47.164 -20.704,47.164 -20,47.868 R3.1 -20,47.918 -19.459,48.459 -19.459,48.684 -19.117,49.025 -18.683,49.025 -18.375,48.717 -18.375,48.674 -14.851,45.15 -5.106,45.15 -4.822,44.865 J4.7
BTN_A: SW5.1 U1.41 | length 45.9
  Top Layer w0.15: v1(-19.987,48.687) -20.538,48.687 -20.55,48.675 -20.55,48.477 -24.741,44.286 -24.939,44.286 -25.232,43.993 -25.232,43.561 -26.014,42.779 -26.014,41.503 -25.514,41.003 -25.514,26.979 -25.16,26.625 -23.853,26.625 -23.519,26.29 -23.519,25.344 -17.5,19.325 -10.05,19.325 SW5.1
  Bottom Layer w0.15: -21,48.687 -20.987,48.7 v1@-20,48.7
BTN_B: SW6.1 U1.40 | length 48.5
  Top Layer w0.15: v1(-20.5,49.2) -20.825,48.875 -20.825,48.591 -24.855,44.561 -25.053,44.561 -25.507,44.107 -25.507,43.909 -27.5,41.916 -27.5,41.293 -27.5,41.093 -26.339,39.932 -26.339,26.637 -26.325,26.623 -26.325,26.33 -28.1,24.555 -28.1,19.375 SW6.1
  Bottom Layer w0.15: U1.40 -21.24,49.2 v1(-20.5,49.2)
BTN_DOWN: SW4.1 U1.31 | length 56.4
  Top Layer w0.15: SW4.1 -43.69,6.092 -43.69,7.294 -38.151,12.833 -37.762,12.833 -36.151,14.444 -36.151,17.697 -32.793,21.055 -32.379,21.055 -26.889,26.544 -26.889,39.704 -28.05,40.865 -28.05,41.065 -28.05,42.144 -26.954,43.24 -26.954,49.424 v1(-24.359,52.019)
  Bottom Layer w0.15: U1.31 -24.404,51.974 v1(-24.359,52.019)
BTN_LEFT: SW1.1 U1.19 | length 47.6
  Top Layer w0.15: SW1.1 -45.567,16.349 -43.985,16.349 -38.883,21.451 -32.371,21.451 -27.164,26.658 -27.164,39.59 -28.325,40.751 -28.325,40.951 -28.34,40.966 -28.34,43.268 -27.654,43.954 -27.654,46.954 v1(-28.8,48.1)
  Bottom Layer w0.15: v1@-28.8,48.2 -28.761,48.161 U1.19
BTN_MENU: SW7.1 U1.10 | length 21.7
  Top Layer w0.15: v1(-27,41.3) -26.8,41.3 -26.064,40.564 -26.064,26.751 -26.05,26.737 -26.05,26.425 -25.7,26.075 SW7.1@-25.7,25.5
  Bottom Layer w0.15: v1(-27,41.3) -27.114,41.3 -28.34,42.526 -28.34,43.268 -28.047,43.561 -27.646,43.561 -27.507,43.7 -26.93,43.7 -26.479,44.15 -26.479,44.461 U1.10
BTN_RIGHT: SW2.1 U1.38 | length 40.8
  Top Layer w0.15: SW2.1 -34.825,17.407 -34.825,18.22 -26.6,26.444 -26.6,26.509 -26.614,26.523 -26.614,39.818 -27.775,40.979 -27.775,41.179 -27.775,42.03 -25.782,44.023 -25.782,44.221 -25.167,44.836 -24.969,44.836 -21.1,48.705 -21.1,49.7 v1(-20.5,50.3)
  Bottom Layer w0.15: U1.38 -20.639,50.161 v1(-20.5,50.3)
BTN_UP: SW3.1 U1.16 | length 42.7
  Top Layer w0.15: SW3.1 -43.043,17.68 -38.997,21.726 -32.485,21.726 -27.439,26.772 -27.439,39.476 -28.6,40.637 -28.6,40.837 -28.615,40.852 -28.615,43.382 -27.949,44.048 -27.949,46.138 -28.611,46.8 -28.9,46.8 v1(-29,46.7)
  Bottom Layer w0.15: v1(-29,46.7) -28.068,46.7 U1.16
GND: C1.1 C2.1 C3.1 C4.1 C5.1 C6.1 C7.1 C8.1 C9.1 C10.1 C11.1 C12.1 C13.1 C14.1 C15.1 D3.1 D4.1 D5.1 D6.2 J1.5 J1.6 J1.7 J1.8 J1.9 J1.10 J1.11 J3.1 J3.4 J4.1 J6.2 LCD1.2 LCD1.5 LCD1.13 Q1.2 R2.2 R3.2 R6.2 R10.2 SW1.2 SW2.2 SW3.2 SW4.2 SW5.2 SW6.2 SW8.2 U1.8 U1.20 U1.23 U1.35 U1.47 U1.49 U2.2 X1.2 X1.4 | length 303.3
  Top Layer w0.3: -49.251,14.605 -48.026,15.829 -48.026,16.104 ; v1(-47.701,57.023) -42.243,51.565 v1(-39.1,51.565) -38.077,50.542 -38.077,49.957 v1(-38.02,49.9) ; v1(-41,49.9) v1(-38.02,49.9) ; SW4.2 -39.818,3.6 -20.25,3.6 -18.6,5.25 SW6.2 -17.975,5.75 -17.675,5.75 SW5.2@-9.125,14.3 ; SW3.2 -40.932,14.286 -41.639,14.286 -41.851,14.498 -46.421,14.498 -48.026,16.104 ; LCD1.5@-40.04,41.75 -40.015,41.775 -34.663,41.775 ; LCD1.13@-40.04,48.15 -37.35,48.15 -35.6,49.9 ; v1(-34.607,46.8) -34.581,46.8 -33.817,47.565 -33.817,47.59 -32.494,48.913 -32.057,48.913 v1(-32,48.97) ; v1(-32.944,43.358) -34.527,41.775 -34.663,41.775 ; v1(-31.804,46.625) -31.804,48.774 v1(-32,48.97) ; v1(-27.2,57.4) -28.142,56.458 -27.965,56.281 v1(-27.965,54.229) ; v1(-25.514,42.3) v1@-25.5,42.286 ; v1(-20.243,41.622) -20.243,42.289 -14.729,47.802 -14.729,54.263 ; J1.6@-11.992,57.4 -11.792,57.6 J1.7@-6.642,57.6 ; J1.6@-11.792,57.2 -14.729,54.263 ; SW5.2 -9.425,14.3 SW5.2@-9.125,14.3 ; J1.7@-6.642,57.2 -6.642,53.773 -6.8,53.615 v1(-6.8,50.107) -6.8,33.885 J4.1 -3.152,29.013 -3.152,19.048 -7.9,14.3 SW5.2@-9.125,14.3 ; -48.026,16.104 -48.026,31.221 -42.052,37.195 -42.052,38.227 -41.029,39.25 -39.99,39.25 -39.89,39.35 -36.614,39.35 -34.638,41.326 -34.638,41.75 -34.663,41.775 ; v1(-38.02,49.9) -35.6,49.9 ; -35.6,49.9 -35.397,50.103 -32,50.103 ; v1(-32,48.97) -32,50.103 ; -32,50.103 -27.965,54.138 v1(-27.965,54.229) ; v1(-27.965,54.229) -15.068,54.229 -14.915,54.077 -14.729,54.263
  Bottom Layer w0.15: C7.1 -28.871,50.09 -28.8,50.161 U1.23@-28.054,50.161 ; U1.20 -25.404,48.661 U1.49 U1.49@-24.654,46.554 ; U1.23 U1.49@-26.904,50.161 ; U1.8@-25.404,44.511 -25.404,43.751 -25.118,43.465 C5.1 ; U1.8 U1.49@-25.404,47.161 ; C6.1 -22.65,52.374 -22.63,52.374 -22.404,52.148 U1.35@-22.404,51.311 ; U1.49@-22.404,45.661 U1.47 ; U1.49@-22.404,50.161 U1.35 ; U1.47@-21.254,45.661 -20.2,45.661 C9.1
  Bottom Layer w0.3: J3.4 -48.901,58.223 v1(-47.701,57.023) ; C11.1@-49.702,53.287 -46.924,53.287 -46.638,53.573 -43.711,53.573 -42.487,52.349 -41.612,52.349 -41.56,52.298 -40.94,52.298 C10.1 -40.96,52.018 -40.96,49.9 v1(-41,49.9) -42.658,49.9 J3.1 ; J6.2 -39.99,44.79 -40.3,45.1 -40.3,47.521 -39.377,48.444 C12.1 v1(-38.02,49.9) ; D4.1 -39.1,51.937 v1(-39.1,51.565) ; Q1.2 -35.195,46.257 -34.652,46.8 v1(-34.607,46.8) ; -32.697,43.053 -32.944,43.3 v1(-32.944,43.358) -32.286,42.7 D6.2 ; C15.1 -31.804,46.596 v1(-31.804,46.625) ; C14.1 -32.5,48.47 v1(-32,48.97) -31.965,48.935 C3.1 -31.03,49.093 -30.063,50.06 -29.426,50.06 C7.1 ; R2.2 -28.1,53.992 -27.965,54.127 -27.949,54.127 C13.1 R10.2@-25.5,54.97 ; v1(-27.2,57.4) -27.053,57.547 -26.622,57.547 ; C8.1 C5.1 -25.118,42.624 -25.126,42.624 -25.287,42.463 v1@-25.287,42.3 ; C2.1 -26.904,59.233 -26.904,57.829 -26.622,57.547 ; v1@-25.6,42.3 v1(-25.514,42.3) v1@-25.287,42.3 ; X1.2 -25.287,41.024 v1@-25.287,42.3 ; C1.1 -24.829,57.547 U2.2 -26.622,57.547 ; C4.1@-22.112,43.035 X1.4 -21.985,41.622 v1(-20.243,41.622) ; C9.1 R3.2 ; D3.1 D3.1@-14.406,60.3 ; v1(-14.441,60.45) J1.8 J1.9 J1.10 J1.11 ; J1.5@-7.842,57.2 -7.842,55.929 -7.7,55.787 -6.913,55.787 -6.642,56.058 J1.7@-6.642,57.2 ; v1(-6.8,50.107) -6.753,50.06 SW8.2@-5.195,50.06
  other v1: -32.614,1.194 -50.094,1.346 -1.194,2.261 -15.621,2.819 -6.909,9.322 -39.563,13.029 -19.634,13.233 -11.049,22.174 -25.5,23.47 -48.997,24.613 -1.676,24.765 -36.555,25.705 -28.412,27.542 -24.593,27.542 -4.826,29.87 -40.763,31.928 -6.68,35.204 -28.543,37.643 -24.463,37.643 -50.302,38.278 -6.68,41.377 -13.513,41.707 -6.934,43.575 -19.888,43.637 -13.843,43.663 -50.521,45.25 -24.654,46.2 -17.871,46.873 -1.127,47.516 -47.777,47.6 -5.148,47.6 -13.64,47.676 -23.374,47.893 -26.3,47.9 -24.7,47.9 -15.723,48.565 -34.434,48.684 -41.925,48.975 -24.654,49.9 -41.925,50.475 -45.364,50.521 -30.836,50.622 -33.985,50.7 -9.642,50.978 -30.328,52.894 -19.761,53.162 -7.715,53.365 -34.07,53.416 -10.592,54.069 -15.57,55.142 -34.925,55.873 -4.659,56.713 -30.48,56.89 -50.65,57.45 -40.82,58.415 -32.207,58.522 -35.941,58.748 -50.625,58.975 -19.022,59.711 -34.5,60.09 -30.957,60.136 -25.187,60.247 -50.114,60.672 -44.494,61.026
LCD_BL: Q1.1 R6.1 U1.13 | length 13
  Bottom Layer w0.15: Q1.1 -37.544,45.726 -36.724,44.907 -35.497,44.907 -35.34,44.75 -34.593,44.75 -34.425,44.918 -33.86,44.918 -33.792,44.85 -28.465,44.85 -28.154,45.161 U1.13
  Bottom Layer w0.2: R6.1@-39.406,47.39 -38.623,46.607 -37.844,46.607 -37.544,46.307 Q1.1
LCD_CS: LCD1.12 U1.25 | length 15.8
  Top Layer w0.15: LCD1.12@-40.04,47.35 -37.251,47.35 -36.801,47.801 -36.467,48.133 -36.297,47.963 v1(-36.297,47.915)
  Bottom Layer w0.15: v1(-36.297,47.915) -36.297,48.234 -34.95,49.581 -34.95,50.994 -34.245,51.699 -28.908,51.699 -28.907,51.7 -27.793,51.7 U1.25@-27.404,51.311
LCD_DC: LCD1.7 U1.14 | length 13.1
  Top Layer w0.15: LCD1.7@-40.04,43.35 -39.865,43.525 -36.525,43.525 v1(-34.8,45.25)
  Bottom Layer w0.15: v1(-34.8,45.25) -33.803,45.25 -33.678,45.125 -31.886,45.125 -31.679,45.332 -28.504,45.332 -28.504,45.394 -28.387,45.511 -28.315,45.511 -28.115,45.711 -28.079,45.711 U1.14
LCD_MOSI: R8.1 U1.17 | length 1.6
  Bottom Layer w0.15: R8.1@-29.487,47.487 -28.869,47.487 -28.543,47.161 U1.17
LCD_RST: LCD1.6 U1.11 | length 14.4
  Top Layer w0.15: LCD1.6@-40.04,42.55 -35.417,42.55 v1(-35.3,42.667)
  Bottom Layer w0.15: v1(-35.3,42.667) -35.3,43.1 -34.504,43.896 -27.8,43.896 -27.635,44.061 -26.957,44.061 -26.904,44.114 U1.11@-26.904,44.511
LCD_SCLK: R9.1 U1.15 | length 1.6
  Bottom Layer w0.15: R9.1 -28.992,45.9 -28.731,46.161 U1.15
MP_COMMS: D4.2 D6.1 D7.2 J5.5 R4.1 U1.12 | length 82.5
  Top Layer w0.3: v1(-38.394,61.362) -38.382,61.35 -17.606,61.35 -17.139,60.882 -17.139,60.782 -15.74,59.383 -13.821,59.383 -13.663,59.225 -13.555,59.225 -11.628,59.225 -11.47,59.383 -6.814,59.383 -6.656,59.225 -4.017,59.225 -3.371,59.871 -2.774,59.871 J5.5
  Bottom Layer w0.2: -33.867,41.775 -33.85,41.758
  Bottom Layer w0.3: R4.1 -40.767,54.267 -39.73,54.267 D4.2 ; v1(-38.394,61.362) -39.583,60.172 D4.2 ; -33.867,41.775 -35.875,41.775 ; D7.2 -33.85,41.758 D6.1 ; U1.12@-27.404,44.511 -27.404,44.45 -34.398,44.45 -34.448,44.4 -34.495,44.4 -35.875,43.02 -35.875,41.775 ; D4.2 -39.633,54.12 -40.235,53.518 -40.235,49.157 -42.44,46.952 -42.44,41.303 -41.762,40.625 -36.646,40.625 -35.875,41.396 -35.875,41.775
MP_COMMS_STATUS: R7.1 U1.27 | length 15
  Top Layer w0.15: v1(-36.536,53.968) -34.688,52.12 v1(-34.688,52.045)
  Bottom Layer w0.15: R7.1 -36.536,55.819 v1(-36.536,53.968) ; v1(-34.688,52.045) -34.777,52.045 -34.8,52.021 -34.753,51.974 -29.022,51.974 -29.021,51.975 -26.6,51.975 -26.404,51.779 U1.27
NetC3_2: C3.2 U1.22 | length 1.7
  Bottom Layer w0.2: C3.2 -29.43,48.97 -28.739,49.661 U1.22@-28.054,49.661
NetC4_2: C4.2 U1.5 X1.1 | length 5.3
  Bottom Layer w0.15: U1.5 -23.904,43.711 -23.254,43.061 C4.2 -23.024,42.999 -23.024,40.961 X1.1
NetC5_2: C5.2 U1.6 X1.3 | length 2.7
  Bottom Layer w0.15: U1.6@-24.404,44.511 -24.404,44.257 -24.179,44.032 -24.179,43.122 C5.2 ; X1.3 C5.2@-24.312,42.867
NetC10_2: C10.2 FB1.1 R4.2 | length 2.6
  Bottom Layer w0.3: FB1.1@-42.175,53.224 -42.175,54.153 R4.2 ; FB1.1@-42.119,53.168 -42.077,53.21 -40.852,53.21 C10.2
NetC11_2: C11.2 FB1.2 J3.3 T1.1 | length 17.3
  Bottom Layer w0.2: FB1.2@-42.175,51.724 -42.1,51.724 -41.85,51.474 -41.85,51.4
  Bottom Layer w0.3: J3.3@-50.802,54.318 -50.835,54.284 -50.835,53.282 -50.802,53.248 -50.802,53.212 -50.188,52.598 -47.363,52.598 -46.489,51.724 -45.8,51.724 ; T1.1 -50.024,47.5 -45.8,51.724 ; FB1.2@-42.175,51.724 -45.8,51.724
  other v1: -50.625,54.475 -50.625,55.975
NetC13_2: C13.2 U2.4 | length 1.7
  Bottom Layer w0.2: U2.4 -28.105,56.31 C13.2
NetC14_2: C14.2 LCD1.8 R8.2 | length 10.7